# Allegro board Naftanaila Luiza Georgiana 431 E PDCE I 2023-2024.brd
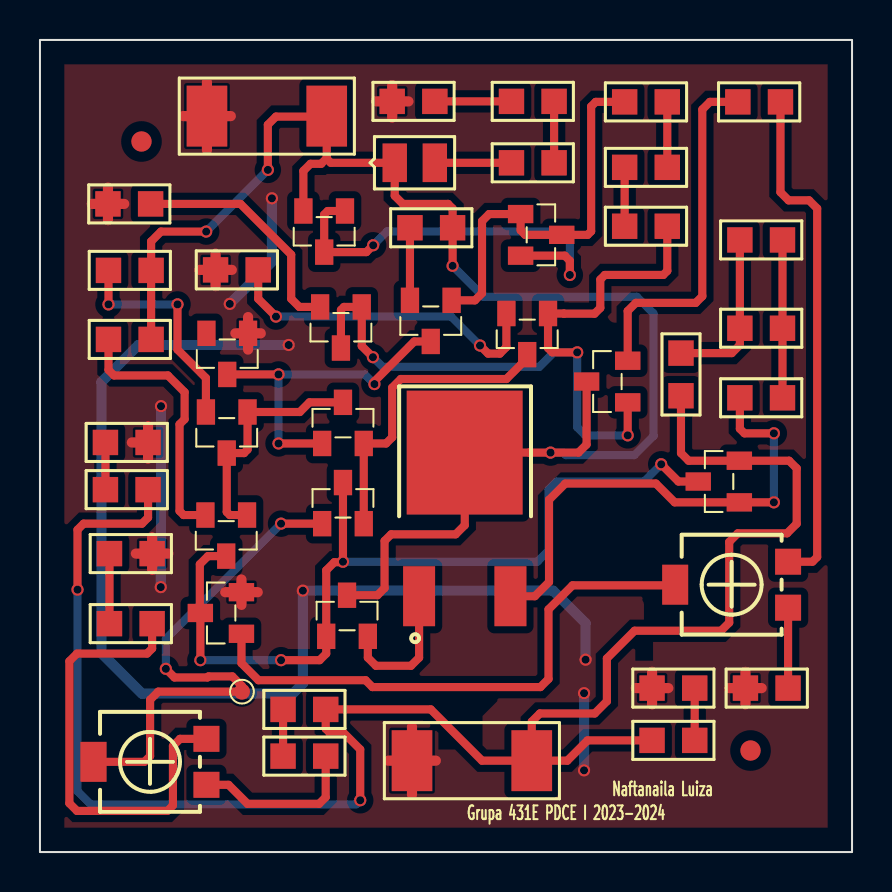
[diagram p0: board, top side]
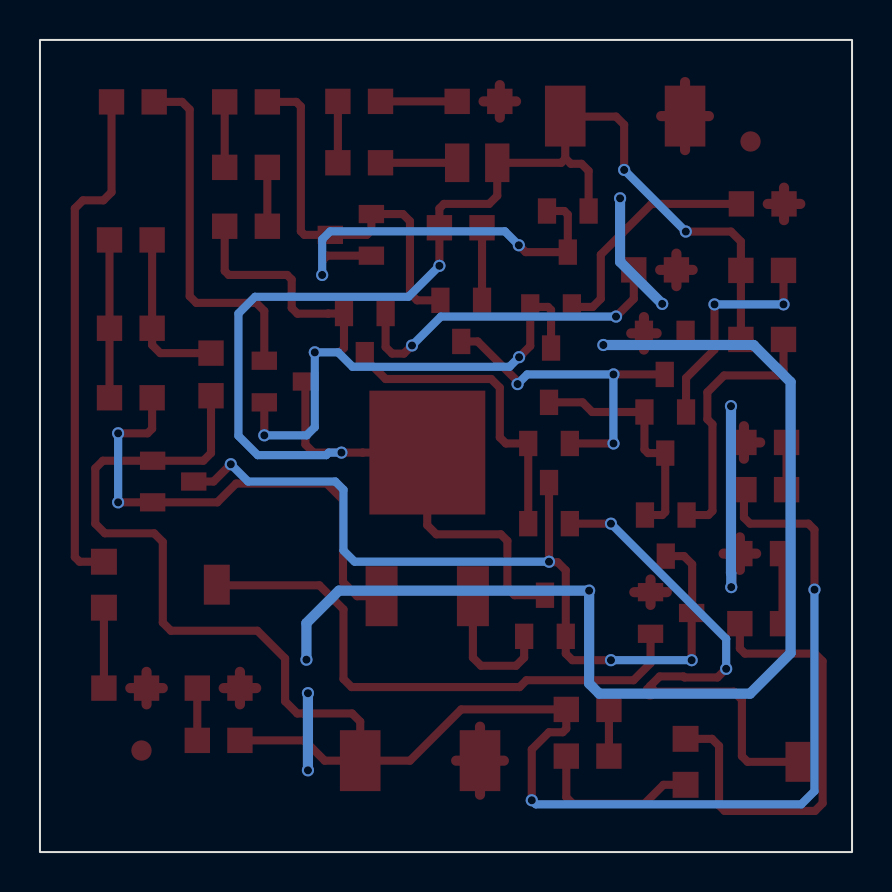
[diagram p1: board, bottom side, seen from below]

Outline 40.64 x 40.64 mm; copper layers: TOP, BOTTOM. Coordinates in mm from the lower left corner of the outline.
Outline path: rectangle 0,0 40.64,40.64

## Design rules (mm)
nets with their own width: min track width 0.406; nets N261947 N262035 N262049 N262061 N262141 N262147 N262303 N262315 N262321 N262327 N262389 N262479 N262485 N262515 N262677 N262683 N262689 N262857 N262869 N262883 N262889 N262917 N262943 N263003 N263015 N263197 N263203 N263395 N263401 N263407 N263455 N267225 N267231 OUT
nets with their own width: min track width 0.508; nets 0

## Placement (name value [footprint] x y rotation side)
D5  BZX84-C5V1  [TO236AA]  10.41 25.96 90 top
D8  SMLS14BET  [SMD080521]  19.76 34.49 0 top
J1  CON2  [SMR2512]  24.61 4.57 180 top
J2  CON2  [SMR2512]  8.36 36.83 0 top
J3  CON1  [TP80]  10.11 8.03 0 top
NOREF  -  [unnamed]  5.08 35.56 0 top
NOREF#2  -  [#2]  40.72 0 90 top
NOREF#3  -  [unnamed]  35.56 5.08 0 top
NOREF#4  -  [#2]  0 40.69 0 top
P1  10k  [TS53YL]  8.33 5.66 0 top
P2  100  [TS53YL]  37.44 14.53 0 top
Q1  QBC807-25  [TO236AA]  10.39 22.02 90 top
Q2  QBC817-25  [TO236AA]  14.12 20.45 270 top
Q3  QBC817-25  [TO236AA]  14.12 16.43 270 top
Q4  QBC807-25  [TO236AA]  10.36 16.87 90 top
Q5  QBC817-25  [TO236AA]  25.43 26.95 90 top
Q12  QBC817-25  [TO236AA]  29.41 22.5 0 top
Q19  QBC807-25  [TO236AA]  20.6 27.61 90 top
Q20  QBC817-25  [TO236AA]  35 17.5 0 top
Q21  QBC817-25  [TO236AA]  10.08 10.92 0 top
Q22  QBC807-25  [TO236AA]  15.27 32.08 90 top
Q23  QBC807-25  [TO236AA]  24.05 31.93 180 top
Q24  QBC817-25  [TO236AA]  16.1 27.28 90 top
QESR1  QBC846B  [TO236AA]  14.33 10.79 270 top
QESR2  QMJD31C  [DPACK]  18.97 12.8 0 top
R2  100  [SMR0805]  18.52 31.24 0 top
R6  15K  [SMR0805]  14.3 7.14 180 top
R8  220  [SMR0805]  10.92 29.13 180 top
R10  100  [SMR0805]  3.43 29.11 0 top
R11  100  [SMR0805]  3.43 25.65 0 top
R12  100  [SMR0805]  12.17 4.8 0 top
R17  1k  [SMR0805]  23.6 34.49 0 top
R18  1k  [SMR0805]  25.73 37.57 180 top
R19  1k  [SMR0805]  19.76 37.57 180 top
R27  1k  [SMR0805]  29.26 37.54 0 top
R28  1k  [SMR0805]  31.39 34.26 180 top
R29  1k  [SMR0805]  29.26 31.32 0 top
R30  220  [SMR0805]  5.54 32.44 180 top
R38  1k  [SMR0805]  3.48 14.94 0 top
R39  33  [SMR0805]  37.44 8.2 180 top
R41  10K  [SMR0805]  5.61 11.43 180 top
R42  220  [SMR0805]  34.92 37.54 0 top
RC1  1  [SMR0805]  35.03 22.73 0 top
RC4  0.47  [SMR0805]  37.16 26.21 180 top
RC5  0.47  [SMR0805]  37.16 30.63 180 top
RC6  0.47  [SMR0805]  32.08 24.97 270 top
RLOAD1  1k  [SMR0805]  5.41 18.14 180 top
RLOAD2  680  [SMR0805]  32.77 8.2 180 top
RLOAD3  680  [SMR0805]  3.28 20.5 0 top
RLOAD4  1k  [SMR0805]  30.63 5.59 0 top

## Library data of the parts
D5 = BZX84-C5V1_4
D8 = SMLS14BET_0
J1 J2 = CON2
J3 = CON1
P1 P2 = POT
Q1 = QBC807-25_8
Q2 = QBC817-25_9
Q3 = QBC817-25_10
Q4 = QBC807-25_9
Q5 = QBC817-25_11
Q12 = QBC817-25_13
Q19 = QBC807-25_7
Q20 = QBC817-25_15
Q21 = QBC817-25_14
Q22 = QBC807-25_5
Q23 = QBC807-25_6
Q24 = QBC817-25_7
QESR1 = QBC846B_1
QESR2 = QMJD31C_0
R2 R6 R8 R10-R12 R17-R19 R27-R30 R38 R39 R41 R42 RC1 RC4-RC6 RLOAD1-RLOAD4 = R

## Footprints (pads in the part's own frame, mm; a bottom-side part is the same pattern mirrored in y, then rotated)
DPACK
  rect 1.6x3 smd: 1(0,0) 3(4.57,0)
  rect 5.8x6.2 smd: 2(2.28,7.19)
SMD080521
  rect 1.219x1.93 smd: 1(0,0) 2(-2.007,0)
SMR0805
  rect 1.27x1.27 smd: 1(0,0) 2(2.134,0)
SMR2512
  rect 2.032x3.048 smd: 1(0,0) 2(5.994,0)
TO236AA
  rect 1.27x0.914 smd: 1(0,0) 2(0,2.083) 3(-2.057,1.041)
TP80
  round 0.8 smd: 1(0,0)
TS53YL
  rect 1.3x1.3 smd: 1(0,0) 3(0,-2.3)
  rect 1.3x2 smd: 2(-5.65,-1.15)
unnamed
  round 1.016 smd: (0,0)

## Nets
0: D5.1 J1.2 J2.1 Q21.2(E) R8.2 R19.2 R30.2 R38.2 R39.2 RLOAD2.2 RLOAD3.2
OUT: J1.1 Q20.2(E) R6.1 RC6.2 RLOAD1.1 RLOAD4.1
N261947: D8.2 J2.2 Q12.3 Q22.2(E) QESR1.3 QESR2.2 R2.2 R10.2 R11.2
N262035: Q20.1 QESR2.3(E) RC1.1
N262049: RC1.2 RC4.1 RC5.1
N262061: RC4.2 RC5.2 RC6.1
N262141: QESR1.2(E) QESR2.1
N262147: Q22.1 Q22.3 Q23.2(E)
N262303: Q3.3 Q4.3 Q20.3 Q21.3 QESR1.1
N262315: Q19.2(E) R2.1
N262321: Q1.2(E) R10.1
N262327: Q4.2(E) R11.1
N262389: Q19.1 Q23.1 Q23.3 R27.1
N262479: D8.1(C) R17.1
N262485: Q1.1 Q1.3 Q2.3 Q4.1
N262515: R6.2 R12.1
N262677: R17.2 R18.1
N262683: D5.3 Q2.1 Q19.3
N262689: P1.3 R12.2
N262857: J3.1 P1.2(T) Q3.1
N262869: R27.2 R28.1
N262883: R18.2 R19.1
N262889: Q2.2(E) Q3.2(E) Q5.3
N262917: P1.1 R41.1
N262943: Q5.1 Q12.1 Q24.1 Q24.3 R29.2
N263003: Q12.2(E) R42.1
N263015: R28.2 R29.1
N263197: P2.1 R42.2
N263203: R38.1 R41.2
N263395: Q24.2(E) R30.1
N263401: Q5.2(E) R8.1
N263407: P2.2(T) Q21.1
N263455: P2.3 R39.1
N267225: RLOAD2.1 RLOAD4.2
N267231: RLOAD1.2 RLOAD3.1

Pads without a net: D5 2

## Via types
v1: diameter 0.61, hole 0.406, TOP to BOTTOM, 35 vias

## Routing (per net, layer and track width the routed paths; a pad name or vN(x,y) marks a point on that pad's centre or on a via; arc(x,y) is an arc through that point)
0: length 114.6
  TOP w0.508: 34.49,8.2 R39.2 ; R39.2 35.31,7.39 ; R39.2 35.31,9.02 ; R39.2 36.12,8.2 ; J2.1 9.55,36.83 ; J2.1 8.36,38.53 ; J2.1 7.16,36.83 ; J2.1 8.36,35.13 ; R30.2 4.22,32.44 ; R30.2 3.4,33.25 ; R30.2 2.59,32.44 ; R30.2 3.4,31.62 ; 10.08,12.37 Q21.2 ; Q21.2 9.27,13 ; Q21.2 10.08,13.64 ; Q21.2 10.9,13 ; 5.41,19.68 RLOAD3.2 ; RLOAD3.2 4.6,20.5 ; RLOAD3.2 5.41,21.31 ; 8.79,28.32 R8.2 ; R8.2 8.79,29.95 ; R8.2 7.98,29.13 ; R8.2 9.6,29.13 ; J1.2 19.81,4.57 ; J1.2 18.62,2.87 ; J1.2 17.42,4.57 ; J1.2 18.62,6.27 ; 10.41,25.15 D5.1 ; D5.1 10.41,26.77 ; D5.1 9.78,25.96 ; D5.1 11.05,25.96 ; R38.2 6.43,14.94 ; R38.2 5.61,15.75 ; R38.2 5.61,14.12 ; R38.2 4.8,14.94 ; 17.63,36.75 R19.2 ; R19.2 17.63,38.38 ; R19.2 18.44,37.57 ; R19.2 16.81,37.57 ; 29.82,8.2 RLOAD2.2 ; RLOAD2.2 30.63,9.02 ; RLOAD2.2 30.63,7.39 ; RLOAD2.2 31.45,8.2
  BOTTOM w0.508: v1(27.3,9.63) 27.3,11.46 25.68,13.08 v1(13.16,13.08) 13.16,8.43 12.65,7.92 5.11,7.92 3.07,9.96 3.07,23.52 4.93,25.37 v1(12.45,25.37) ; v1(6.06,22.31) 6.06,13.96 6.05,13.94 v1(6.05,13.26) ; v1(27.23,7.95) v1(27.23,4.09) ; v1(9.5,27.43) 11.61,29.54 v1(11.61,32.72)
OUT: length 90.9
  TOP w0.406: J1.1 22.12,4.57 19.56,7.14 R6.1 14.3,6.17 14.48,5.99 15.17,5.99 16.03,5.13 v1(16.03,2.59) ; J1.1 24.61,6.53 25.02,6.93 27.76,6.93 28.37,7.54 28.37,9.69 29.76,11.07 34.09,11.07 34.49,11.48 34.49,15.52 34.92,15.95 37.39,15.95 37.87,16.43 37.87,19.2 37.49,19.58 Q20.2 32.46,19.58 32.08,19.96 RC6.2 ; J1.1 26.39,4.57 27.41,5.59 RLOAD4.1 ; v1(1.88,13.13) 1.88,16.13 2.18,16.43 5.11,16.43 5.41,16.74 RLOAD1.1
  BOTTOM w0.406: v1(16.03,2.59) 15.82,2.39 2.54,2.39 1.88,3.05 v1(1.88,13.13)
N261947: length 79
  TOP w0.406: QESR2.2 24.48,19.99 24.49,19.99 v1(25.55,19.99) 26.95,19.99 27.36,20.4 Q12.3 ; QESR2.2 21.26,19.99 21.26,16.36 20.8,15.9 17.58,15.9 17.25,15.57 17.25,13.21 16.89,12.85 QESR1.3 ; QESR2.2 21.21,20.04 ; QESR2.2 21.23,19.97 ; 14.35,34.72 J2.2 14.33,36.8 11.81,36.8 11.4,36.4 v1(11.4,34.14) ; 14.35,34.72 14.35,34.7 14.55,34.49 D8.2 17.75,32.84 18.16,32.44 20.42,32.44 20.65,32.21 R2.2 v1(20.65,29.34) ; 14.35,34.72 14.07,34.44 13.54,34.44 13.18,34.09 Q22.2 ; R11.2 R10.2 5.56,30.56 6.06,31.05 v1(8.32,31.05)
  BOTTOM w0.406: v1(11.4,34.14) v1(8.32,31.05) ; v1(25.55,19.99) 26.19,19.99 26.31,19.86 29.74,19.86 30.71,20.83 30.71,26.95 29.87,27.79 22.2,27.79 v1(20.65,29.34)
N262035: length 25.1
  TOP w0.406: v1(36.73,17.5) Q20.1 31.76,17.5 30.82,18.44 26.29,18.44 25.48,17.63 25.48,13.51 24.77,12.8 QESR2.3 ; RC1.1 35.03,21.18 35.26,20.95 v1(36.73,20.95)
  BOTTOM w0.406: v1(36.73,20.95) v1(36.73,17.5)
N262049: length 7.9
  TOP w0.406: RC1.2 RC4.1 RC5.1
N262061: length 8.4
  TOP w0.406: RC5.2 RC4.2 35.03,25.37 34.62,24.97 RC6.1
N262141: length 7
  TOP w0.406: QESR2.1 18.97,9.73 18.57,9.32 16.81,9.32 16.41,9.73 QESR1.2
N262147: length 20.9
  TOP w0.406: v1(26.52,28.88) 26.52,29.59 26.26,29.84 24.05,29.84 ; Q22.1 14.4,32.08 14.22,31.9 Q22.3 16.33,30.02 v1(16.68,30.37)
  BOTTOM w0.406: v1(16.68,30.37) 17.37,31.06 26.11,31.06 26.52,30.66 v1(26.52,28.88)
N262303: length 43.8
  TOP w0.406: Q3.3 v1(15.16,14.53) 15.14,14.5 14.73,14.5 14.33,14.1 QESR1.1 14.33,9.93 14,9.6 v1(12.06,9.6) ; Q4.3 8.41,14.81 8,14.4 8,11.99 Q21.3 v1(8.03,9.6) ; v1(31.09,19.41) 31.95,18.54 Q20.3
  BOTTOM w0.406: v1(31.09,19.41) 30.23,18.54 25.86,18.54 25.45,18.14 25.45,15.09 24.89,14.53 v1(15.16,14.53) ; v1(12.06,9.6) v1(8.03,9.6)
N262315: length 3.6
  TOP w0.406: R2.1 Q19.2
N262321: length 11.1
  TOP w0.406: R10.1 v1(3.43,27.41) ; Q1.2 8.31,23.72 6.88,25.15 v1(6.88,27.41)
  BOTTOM w0.406: v1(3.43,27.41) v1(6.88,27.41)
N262327: length 13.2
  TOP w0.406: Q4.2 7.19,16.87 6.99,17.07 6.99,21.41 7.24,21.66 7.24,23.01 6.4,23.85 3.71,23.85 3.43,24.13 R11.1
N262389: length 19.9
  TOP w0.406: Q19.1 21.77,27.61 22.12,27.97 22.12,31.57 22.48,31.93 Q23.1 24.05,31.11 24.28,30.89 Q23.3 27.41,30.89 27.58,31.06 27.58,37.31 27.81,37.54 R27.1
N262479: length 3.8
  TOP w0.406: D8.1 R17.1
N262485: length 12
  TOP w0.406: Q2.3 13.49,22.5 13,22.02 Q1.1 10.39,20.14 10.21,19.96 Q1.3 9.35,17.02 9.5,16.87 Q4.1
N262515: length 2.3
  TOP w0.406: R6.2 R12.1
N262677: length 3.1
  TOP w0.406: R18.1 R17.2
N262683: length 17
  TOP w0.406: D5.3 v1(11.94,23.9) ; Q19.3 18.73,25.55 16.74,23.56 v1(16.74,23.42) ; v1(11.94,20.45) Q2.1
  BOTTOM w0.406: v1(11.94,20.45) v1(11.94,23.9) 16.26,23.9 v1(16.74,23.42)
N262689: length 8.6
  TOP w0.406: P1.3 9.44,3.36 10.39,2.41 13.97,2.41 14.3,2.74 R12.2
N262857: length 26.7
  TOP w0.406: v1(12.06,16.43) Q3.1 ; v1(6.3,9.17) 6.73,8.74 8.38,8.74 8.44,8.79 9.63,8.79 10.11,8.31 J3.1 5.92,8.03 5.51,7.62 5.51,4.8 5.23,4.51 P1.2
  BOTTOM w0.406: v1(6.3,9.17) 6.3,10.67 v1(12.06,16.43)
N262869: length 3.3
  TOP w0.406: R27.2 R28.1
N262883: length 3.8
  TOP w0.406: R18.2 R19.1
N262889: length 15.6
  TOP w0.406: Q5.3 24.38,24.71 23.34,23.67 18.06,23.67 17.63,23.24 17.63,20.75 17.32,20.45 Q2.2 Q3.2
N262917: length 23
  TOP w0.406: P1.1 7.01,5.66 6.65,5.31 6.65,2.34 6.38,2.06 1.85,2.06 1.47,2.44 1.47,9.55 1.85,9.93 5.36,9.93 5.61,10.19 R41.1
N262943: length 37.8
  TOP w0.406: Q24.3 15.06,27.13 15.21,27.28 Q24.1 16.1,25.32 v1(16.66,24.77) ; v1(29.41,20.85) Q12.1 ; R29.2 31.39,29.08 31.19,28.88 28.27,28.88 28.04,28.65 28.04,27.23 27.75,26.94 26.22,26.94 26.21,26.95 Q5.1 25.43,25.22 25.64,25.01 v1(26.89,25.01)
  BOTTOM w0.406: v1(29.41,20.85) 27.29,20.85 26.89,21.26 v1(26.89,25.01) 25.72,25.01 24.99,24.28 17.14,24.28 v1(16.66,24.77)
N263003: length 17.8
  TOP w0.406: R42.1 33.53,37.54 33.15,37.16 33.15,27.81 32.82,27.48 29.82,27.48 29.41,27.08 Q12.2
N263015: length 2.9
  TOP w0.406: R29.1 R28.2
N263197: length 25.7
  TOP w0.406: P2.1 38.66,14.53 38.9,14.77 38.9,32.21 38.49,32.61 37.47,32.61 37.06,33.02 R42.2
N263203: length 3.5
  TOP w0.406: R38.1 R41.2
N263395: length 11.9
  TOP w0.406: R30.1 10.03,32.44 12.57,29.9 12.57,27.69 12.98,27.28 Q24.2
N263401: length 16.8
  TOP w0.406: Q5.2 23.34,25.27 23.01,24.94 22.43,24.94 v1(22.02,25.35) ; v1(11.81,26.8) 10.92,27.69 R8.1
  BOTTOM w0.406: v1(22.02,25.35) 20.57,26.8 v1(11.81,26.8)
N263407: length 27.9
  TOP w0.406: P2.2 31.79,13.35 26.65,13.35 25.45,12.14 25.45,8.66 25.04,8.26 16.64,8.26 16.29,8.6 10.93,8.6 10.08,9.45 Q21.1
N263455: length 4
  TOP w0.406: R39.1 P2.3
N267225: length 2.6
  TOP w0.406: RLOAD4.2 RLOAD2.1
N267231: length 2.4
  TOP w0.406: RLOAD1.2 RLOAD3.1

## Copper pours and planes (outline as drawn; the poured copper is in the pictures)
0 on TOP: 1.22,1.22 1.22,39.42 39.42,39.42 39.42,1.22 ; 18 cut-outs

## Text on the board
Ref Des/Silkscreen Top: Grupa 431E PDCE I 2023-2024 | Naftanaila Luiza
XSECTION_CHART: *  SURFACE | L1 TOP CONDUCTOR | *  DIELECTRIC | L2 BOTTOM CONDUCTOR | DESIGN CROSS SECTION CHART | ___________________________ | TOTAL THICKNESS 64 MIL | 1-2
DIMENSION: FIGURE | FINISHED_SIZE | 16.0 | ALL UNITS ARE IN MILS | DRILL CHART: TOP to BOTTOM | PLATED | QTY | 36 | TOTAL HOLES:
